# EAGLE board PISO (EAGLE 9.7.0)

Size 168.37 x 131.56 mm. Coordinates in mm from the lower left corner, seen from the top.
Outline: 0,0 168.37,0 168.37,131.56 0,131.56 0,0
Copper layers (1*16): Top 0.035mm / dielectric 1.5mm / Bottom 0.035mm
Design rules "default": minimum track width 6mil, minimum drill 0.35mm, track to track 6mil, track to pad 6mil, pad to pad 6mil, via to via 6mil, smd to smd 6mil, copper to edge 40mil, drill to drill 6mil, minimum pad ring 10mil, minimum via ring 8mil, stop-mask expansion 4mil, vias tented up to drill 0mil, thermal gap 10mil

## Footprints (pad centres in the part's own frame; a part is rotated, then mirrored left to right if it is on the bottom)
LEDRD254W60D565H860B = drill 0.981 pad 1.581: 1 -1.27,0; 2 1.27,0
BATTERY-GENERIC = drill 1.118 pad 3.15 octagon: + 2.54,0; - -2.54,0
RESAD1016W63L850D250B = drill 0.83 pad 1.43: 1 -5.08,0; 2 5.08,0
SWITCH-SPDT-PTH-8.5X3.7MM = drill 1.016 pad 1.88: 1 -2.54,0; 2 0,0; 3 2.54,0
78B06ST = drill 0.8: 1 -6.35,-3.81; 2 -3.81,-3.81; 3 -1.27,-3.81; 4 1.27,-3.81; 5 3.81,-3.81; 6 6.35,-3.81; 7 6.35,3.81; 8 3.81,3.81; 9 1.27,3.81; 10 -1.27,3.81; 11 -3.81,3.81; 12 -6.35,3.81
DIP762W53P254L1969H508Q14B = drill 0.743 pad 1.343: 1 -3.81,7.62; 2 -3.81,5.08; 3 -3.81,2.54; 4 -3.81,0; 5 -3.81,-2.54; 6 -3.81,-5.08; 7 -3.81,-7.62; 8 3.81,-7.62; 9 3.81,-5.08; 10 3.81,-2.54; 11 3.81,0; 12 3.81,2.54; 13 3.81,5.08; 14 3.81,7.62

## Placement (x,y rotation side)
D1  RED  [LEDRD254W60D565H860B]  160.77,76.67 180 top
P1  BATTERYGENERIC  [BATTERY-GENERIC]  8.26,8.26 180 top
R1  1k  [RESAD1016W63L850D250B]  162.04,66.51 90 top
S1  TOGGLE  [SWITCH-SPDT-PTH-8.5X3.7MM]  32.5,56.35 0 top
SW1  SPST-678B06ST  [78B06ST]  18.65,122.04 0 top
U1  74HC74_PDIP  [DIP762W53P254L1969H508Q14B]  55.36,65.24 90 top
U2  74HC74_PDIP  [DIP762W53P254L1969H508Q14B]  134.1,65.24 90 top
U3  74HC04_PDIP  [DIP762W53P254L1969H508Q14B]  42.78,122.04 90 top
U4  74HC32_PDIP  [DIP762W53P254L1969H508Q14B]  113.9,122.04 90 top
U5  74HC08_PDIP  [DIP762W53P254L1969H508Q14B]  78.34,122.04 90 top
U6  74HC08_PDIP  [DIP762W53P254L1969H508Q14B]  144.38,122.04 90 top

## Library data of the parts
D1 = Tinkercad; CATEGORY: Opto-Electronic; SUB-CATEGORY: LED; VALUE: LED_RED
P1 R1 S1 SW1 U1-U6 = Tinkercad

## Nets
D1_A: D1.1 R1.2
P1+: P1.+ S1.1 SW1.7 SW1.8 SW1.9 SW1.10 SW1.11 SW1.12 U1.1 U1.4 U1.10 U1.13 U1.14 U2.1 U2.4 U2.10 U2.13 U2.14 U3.14 U4.14 U5.14 U6.14
P1-: D1.2 P1.- S1.3 U1.7 U2.7 U3.7 U4.7 U5.7 U6.7
U1_1Q: U1.5 U5.2
U1_2Q: U1.9 U5.12
U1_CLK1: S1.2 U1.3 U1.11 U2.3 U2.11
U1_D1: SW1.2 U1.2
U2_1Q: U2.5 U6.1
U2_2Q: R1.1 U2.9
U3_1A: SW1.1 U3.1 U5.1 U5.13 U6.2
U3_1Y: U3.2 U5.4 U5.10 U6.4
U4_1Y: U1.12 U4.3
U4_2Y: U2.12 U4.6
U4_4Y: U2.2 U4.11
U5_1Y: U4.1 U5.3
U5_2B: SW1.3 U5.5
U5_2Y: U4.2 U5.6
U5_3A: SW1.4 U5.9
U5_3Y: U4.12 U5.8
U5_4Y: U4.13 U5.11
U6_1Y: U4.4 U6.3
U6_2B: SW1.5 U6.5
U6_2Y: U4.5 U6.6

## Tracks (layer width: path | path; a pad name or v marks a point on that pad's centre or on a via)
D1_A  (1 unrouted)
P1+  (21 unrouted)
P1-  (8 unrouted)
U1_1Q  (1 unrouted)
U1_2Q  (1 unrouted)
U1_CLK1  (4 unrouted)
U1_D1  (1 unrouted)
U2_1Q  (1 unrouted)
U2_2Q  (1 unrouted)
U3_1A  (4 unrouted)
U3_1Y  (3 unrouted)
U4_1Y  (1 unrouted)
U4_2Y  (1 unrouted)
U4_4Y  (1 unrouted)
U5_1Y  (1 unrouted)
U5_2B  (1 unrouted)
U5_2Y  (1 unrouted)
U5_3A  (1 unrouted)
U5_3Y  (1 unrouted)
U5_4Y  (1 unrouted)
U6_1Y  (1 unrouted)
U6_2B  (1 unrouted)
U6_2Y  (1 unrouted)